# EAGLE board chuveiro (EAGLE 5.06)
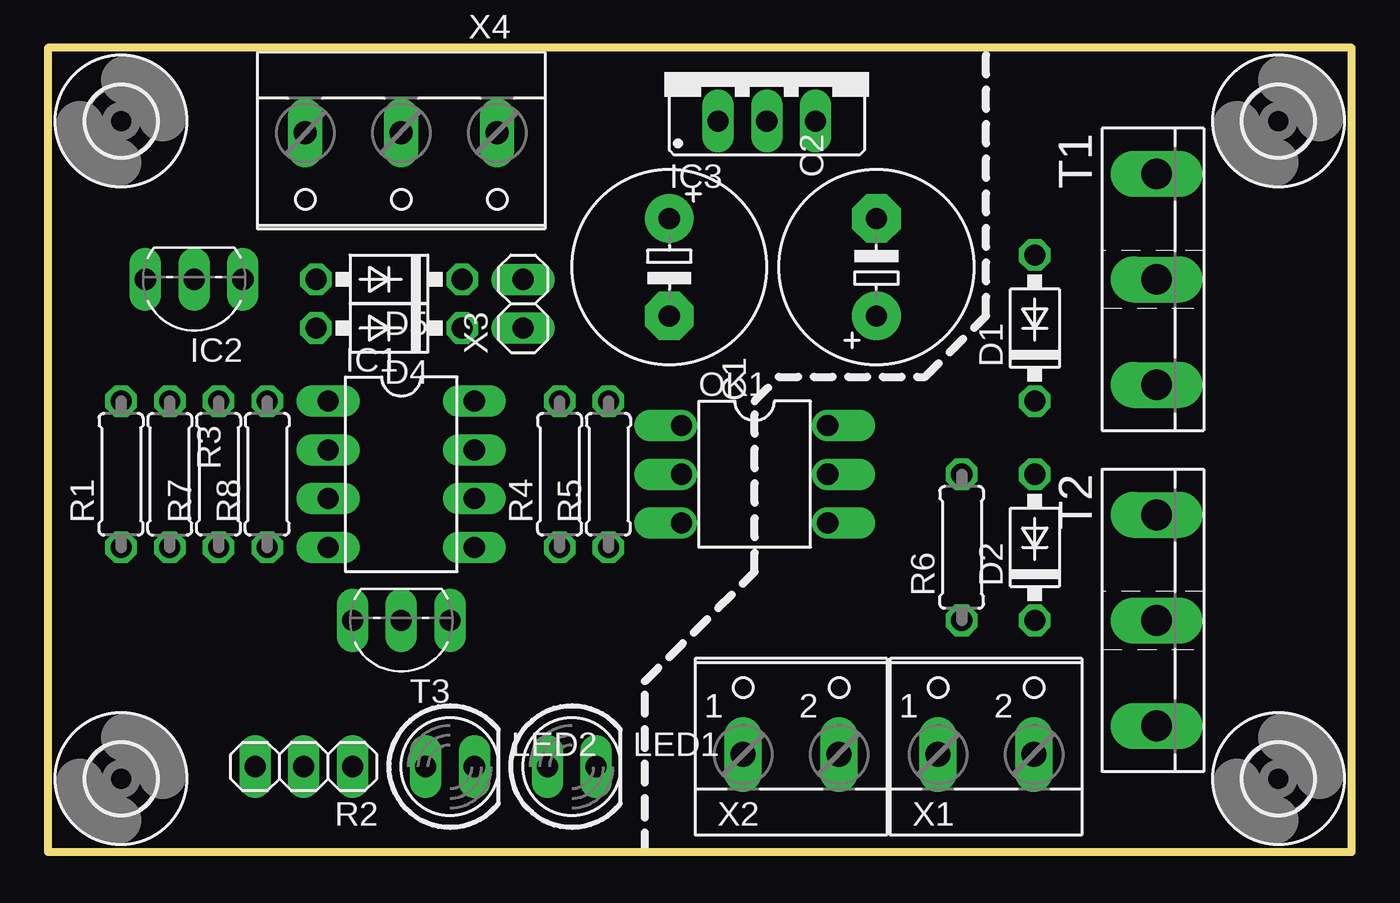
[diagram p0: board, top side]
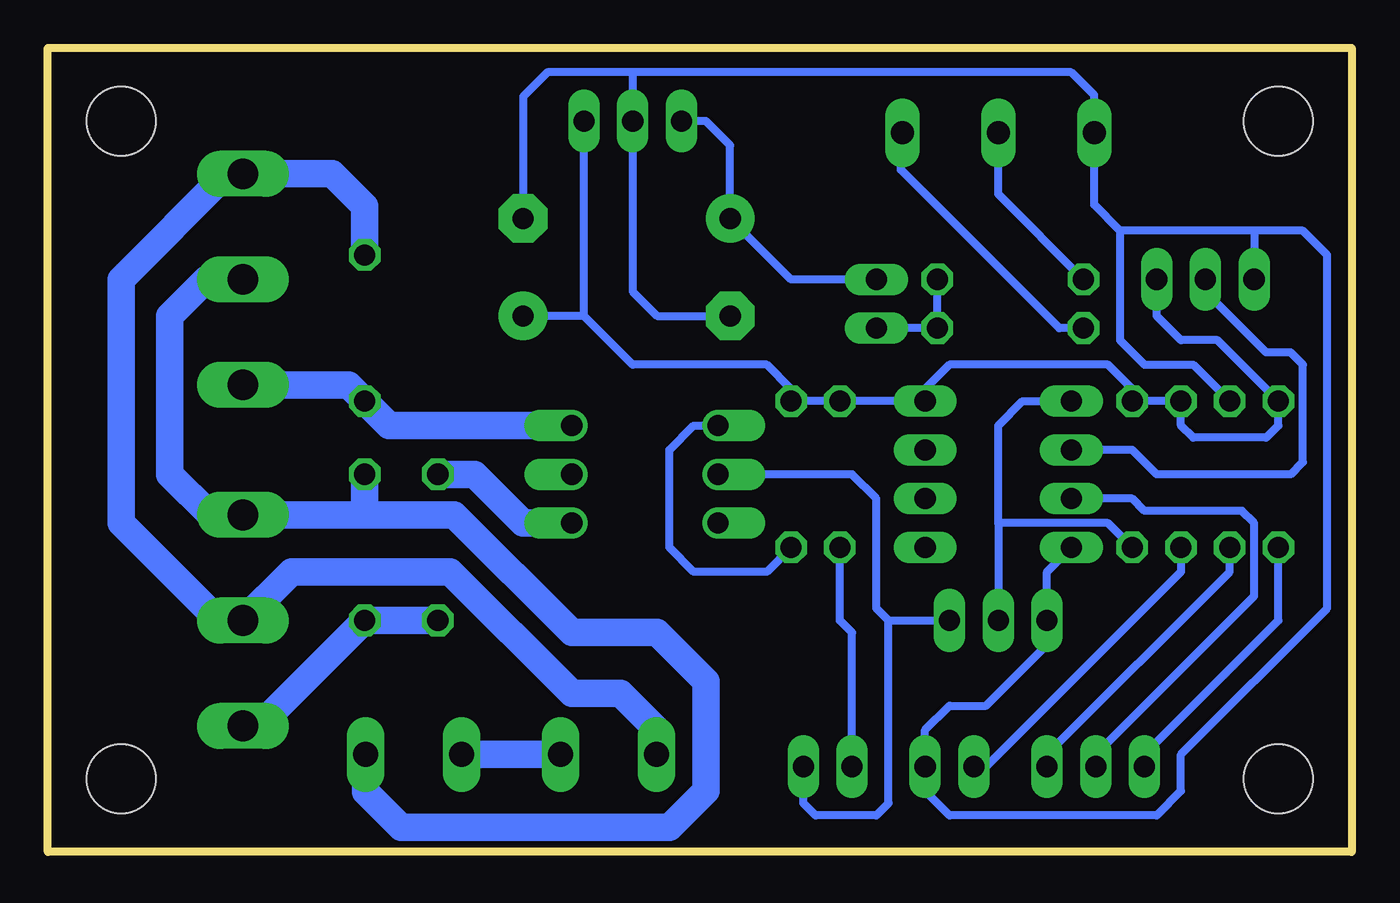
[diagram p1: board, bottom side, seen from below]

Size 67.94 x 41.91 mm. Coordinates in mm from the lower left corner, seen from the top.
Outline: 0,0 67.94,0 67.94,41.91 0,41.91 0,0
Copper layers (1*16): Top 0.035mm / dielectric 1.5mm / Bottom 0.035mm
Design rules "default": minimum track width 10mil, minimum drill 24mil, track to track 8mil, track to pad 8mil, pad to pad 8mil, via to via 8mil, smd to smd 8mil, copper to edge 40mil, drill to drill 8mil, minimum pad ring 10mil, minimum via ring 8mil, stop-mask expansion 4mil, vias tented up to drill 0mil, thermal gap 10mil

## Footprints (pad centres in the part's own frame; a part is rotated, then mirrored left to right if it is on the bottom)
E5-10,5 = drill 1.1 pad 2.54 round: + -2.54,0 | drill 1.1 pad 2.54 octagon: - 2.54,0
DO41-10 = drill 1.1 octagon: A 3.81,0; C -3.81,0
DIL08 = drill 1.1 long: 1 -3.81,-3.81; 2 -1.27,-3.81; 3 1.27,-3.81; 4 3.81,-3.81; 5 3.81,3.81; 6 1.27,3.81; 7 -1.27,3.81; 8 -3.81,3.81
TO92- = drill 1.1 long: 1 2.54,0; 2 0,0; 3 -2.54,0
78XXS = drill 1.1 long: GND 0,-2.54; IN -2.54,-2.54; OUT 2.54,-2.54
LED5MM = drill 1.1 long: A -1.27,0; K 1.27,0
DIL06 = drill 1.1 offset: 1 -2.54,-3.81; 2 0,-3.81; 3 2.54,-3.81; 4 2.54,3.81; 5 0,3.81; 6 -2.54,3.81
0207/7 = drill 1.1 octagon: 1 -3.81,0; 2 3.81,0
1X03 = drill 1.1 long: 1 -2.54,0; 2 0,0; 3 2.54,0
TO-247AD-V = drill 1.6 long: A 0,-2.54; C -5.5,-2.54; G 5.5,-2.54
3,6 = hole 3.6: 0,0
W237-102 = drill 1.3 long: 1 -2.5,-1.27; 2 2.5,-1.27
1X02 = drill 1.1 long: 1 -1.27,0; 2 1.27,0
W237-103 = drill 1.2 long: 1 -5,-1.29; 2 0,-1.29; 3 5,-1.29

## Placement (x,y rotation side)
C1  1000uF/35V  [E5-10,5]  32.38,30.48 270 top
C2  1000uF/35V  [E5-10,5]  43.18,30.48 90 top
D1  1N4007  [DO41-10]  51.44,27.3 90 top
D2  1N4007  [DO41-10]  51.44,15.88 90 top
D4  1N4007  [DO41-10]  17.78,27.3 180 top
D5  1N4007  [DO41-10]  17.78,29.84 180 top
IC1  LM393N  [DIL08]  18.41,19.68 270 top
IC2  LM35  [TO92-]  7.62,29.84 180 top
IC3  7805  [78XXS]  37.47,40.64 0 top
LED1  [LED5MM]  27.3,4.45 0 top
LED2  [LED5MM]  20.95,4.45 0 top
OK1  MOC3043  [DIL06]  36.83,19.68 270 top
R1  220k  [0207/7]  3.81,19.68 90 top
R2  10k  [1X03]  13.34,4.45 180 top
R3  10k  [0207/7]  6.35,19.68 270 top
R4  220  [0207/7]  26.67,19.68 90 top
R5  220  [0207/7]  29.21,19.68 90 top
R6  360  [0207/7]  47.62,15.88 90 top
R7  1k  [0207/7]  8.89,19.68 90 top
R8  10k  [0207/7]  11.43,19.68 90 top
T1  40TPS08  [TO-247AD-V]  60.33,29.84 270 top
T2  40TPS08  [TO-247AD-V]  60.33,12.06 270 top
T3  BC547  [TO92-]  18.41,12.06 180 top
U$1  [3,6]  3.81,38.1 0 top
U$2  [3,6]  3.81,3.81 0 top
U$3  [3,6]  64.14,38.1 0 top
U$4  [3,6]  64.14,3.81 0 top
X1  CHUVEIRO  [W237-102]  48.9,6.35 0 top
X2  REDE  [W237-102]  38.73,6.35 0 top
X3  LIG DES  [1X02]  24.77,28.57 90 top
X4  [W237-103]  18.41,36.2 180 top

## Library data of the parts
C1 C2 D1 D2 D4 D5 IC1-IC3 LED1 LED2 OK1 R1-R8 T1-T3 U$1-U$4 X1-X4 = chuveiro

## Nets
+5V: C2.+ IC1.8 IC2.3 IC3.OUT R1.2 R4.2 R5.2 R7.2 R8.2
GND: C1.- C2.- IC1.4 IC2.1 IC3.GND LED2.K R3.1 T3.1 X4.3
N$1: IC1.2 IC2.2
N$2: R1.1 R2.3
N$3: R2.1 R3.2
N$4: IC1.3 R2.2
N$5: LED1.K OK1.2 T3.3
N$6: LED1.A R4.1
N$7: OK1.1 R5.1
N$8: D4.A X4.1
N$9: D5.A X4.2
N$10: D4.C D5.C X3.1
N$11: IC1.1 R8.1 T3.2
N$15: C1.+ IC3.IN X3.2
N$16: LED2.A R7.1
P2: X1.1 X2.2
P_1: D1.A T1.C T2.A X2.1
P_3: D2.A T1.A T2.C X1.2
P_4: D2.C R6.1 T2.G
P_5: D1.C OK1.6 T1.G
P_6: OK1.4 R6.2

## Tracks (layer width: path | path; a pad name or v marks a point on that pad's centre or on a via)
+5V
  Bottom 0.406: 40.01,27.94 C2.+ | 40.01,27.94 IC3.OUT | IC2.3 10.16,27.94 8.89,26.67 6.99,26.67 R1.2 3.81,22.23 4.45,21.59 8.26,21.59 8.89,22.23 R7.2 R8.2 11.43,24.13 12.7,25.4 20.95,25.4 22.23,24.13 IC1.8 R4.2 R5.2 29.21,24.13 30.48,25.4 37.47,25.4 40.01,27.94
GND
  Bottom 0.406: IC1.4 15.88,14.61 T3.1 15.88,10.79 19.05,7.62 20.95,7.62 22.23,6.35 LED2.K 22.23,3.17 20.95,1.91 10.16,1.91 8.89,3.17 8.89,5.08 1.27,12.7 1.27,31.11 2.54,32.38 5.08,32.38 | C2.- 43.18,39.37 41.91,40.64 37.47,40.64 | 37.47,40.64 IC3.GND 37.47,29.21 36.2,27.94 C1.- | 37.47,40.64 14.61,40.64 13.41,39.45 X4.3 13.41,33.73 12.06,32.38 | 12.06,32.38 12.06,26.67 10.79,25.4 8.26,25.4 R3.1 | 5.08,32.38 12.06,32.38 | 5.08,32.38 IC2.1
N$1
  Bottom 0.406: IC2.2 7.62,29.21 4.45,26.04 3.17,26.04 2.54,25.4 2.54,20.32 3.17,19.68 10.16,19.68 11.43,20.95 IC1.2
N$2
  Bottom 0.406: R1.1 3.81,12.06 10.79,5.08 R2.3
N$3
  Bottom 0.406: R3.2 6.35,14.61 15.88,5.08 R2.1
N$4
  Bottom 0.406: R2.2 13.34,5.08 5.08,13.34 5.08,17.14 5.71,17.78 10.79,17.78 11.43,18.41 IC1.3
N$5
  Bottom 0.406: LED1.K 28.57,2.54 27.94,1.91 24.77,1.91 24.13,2.54 24.13,12.06 | OK1.2 26.04,19.68 24.77,18.41 24.77,12.7 24.13,12.06 | 24.13,12.06 T3.3
N$6
  Bottom 0.406: R4.1 26.67,12.06 26.04,11.43 LED1.A
N$7
  Bottom 0.406: R5.1 30.48,14.61 34.29,14.61 35.56,15.88 35.56,20.95 34.29,22.23 OK1.1
N$8
  Bottom 0.406: D4.A 15.24,27.3 23.5,35.56 23.5,37.41 X4.1
N$9
  Bottom 0.406: X4.2 18.41,34.29 D5.A
N$10
  Bottom 0.406: D5.C D4.C X3.1
N$11
  Bottom 0.406: R8.1 12.7,17.14 18.41,17.14 | IC1.1 17.14,23.5 18.41,22.23 18.41,17.14 | 18.41,17.14 T3.2
N$15
  Bottom 0.406: X3.2 29.21,29.84 C1.+ 32.38,36.83 33.66,38.1 IC3.IN
N$16
  Bottom 0.406: R7.1 8.89,14.61 19.05,4.45 LED2.A
P2
  Bottom 1.422: X2.2 X1.1
P_1
  Bottom 1.27: X2.1 36.2,5.12
  Bottom 1.422: 36.2,5.12 36.2,6.35 38.1,8.26 40.64,8.26 46.99,14.61 55.24,14.61 T2.A 59.05,12.06 64.14,17.14 64.14,29.84 58.63,35.34 T1.C 53.12,35.34 51.44,33.66 D1.A
P_3
  Bottom 1.422: T1.A 59.69,29.84 61.59,27.94 61.59,19.68 59.48,17.57 T2.C 51.44,17.57 | 51.44,17.57 46.77,17.57 40.64,11.43 36.2,11.43 33.66,8.89 33.66,3.17 35.56,1.27 49.53,1.27 51.4,3.13 X1.2 | 51.44,17.57 D2.A
P_4
  Bottom 1.422: R6.1 D2.C 56.94,6.57 T2.G
P_5
  Bottom 1.422: OK1.6 50.16,22.23 D1.C 52.28,24.34 T1.G
P_6
  Bottom 1.422: OK1.4 43.18,17.14 45.72,19.68 R6.2